# Altium PCB Amplifier.PcbDoc
Units mm, origin at the board's own origin, x right, y up, seen from the top; angles counter-clockwise.
Board outline 40.88 x 23.94 mm, 2 copper layers (Top Layer, Bottom Layer); 18 components, 10 nets, 33 pads, 55 vias.
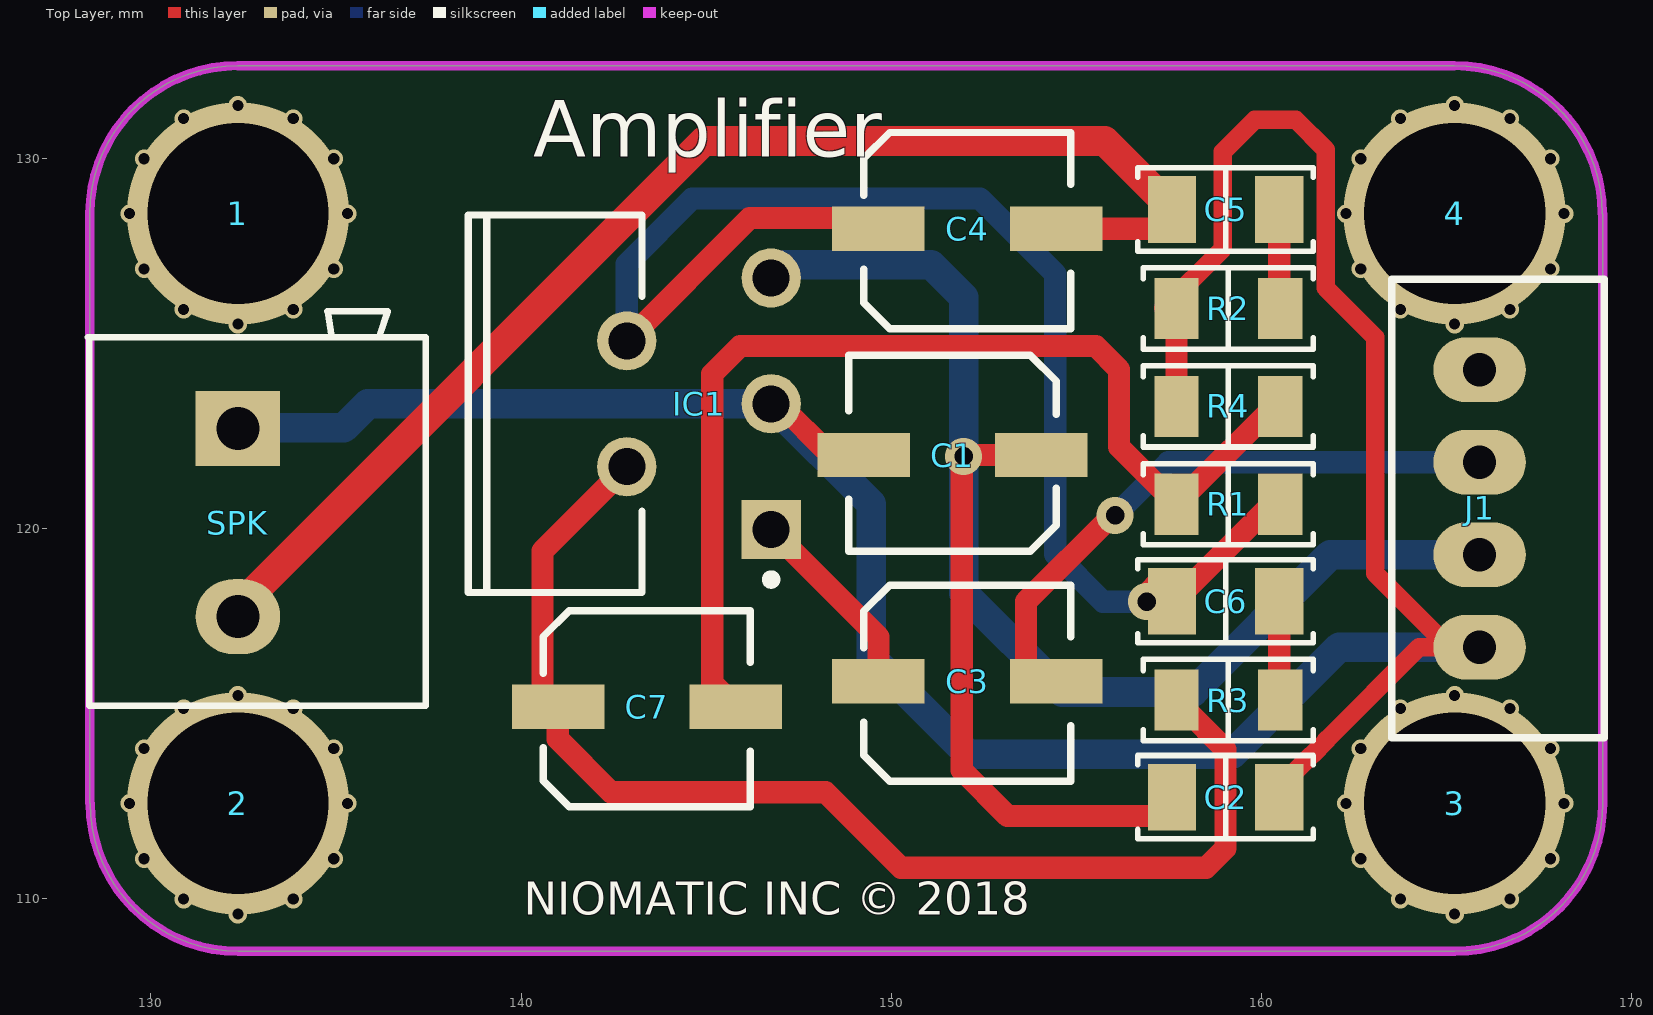
[diagram p0: Top Layer view]
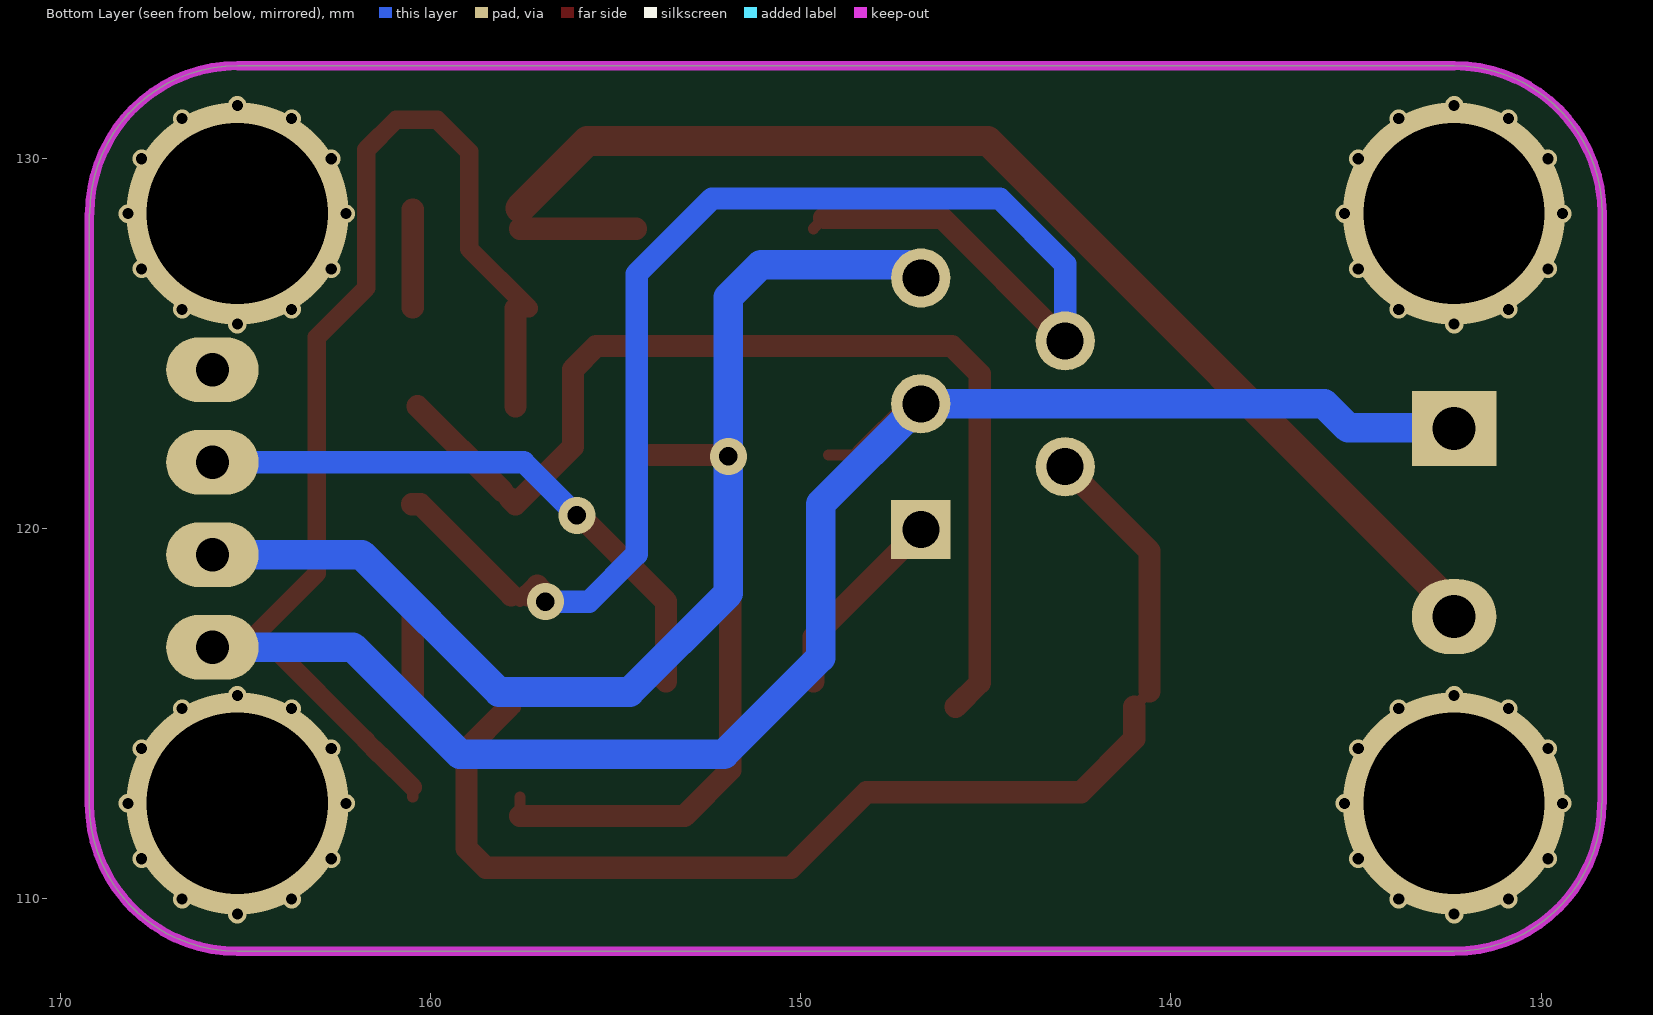
[diagram p1: Bottom Layer view, seen from below]
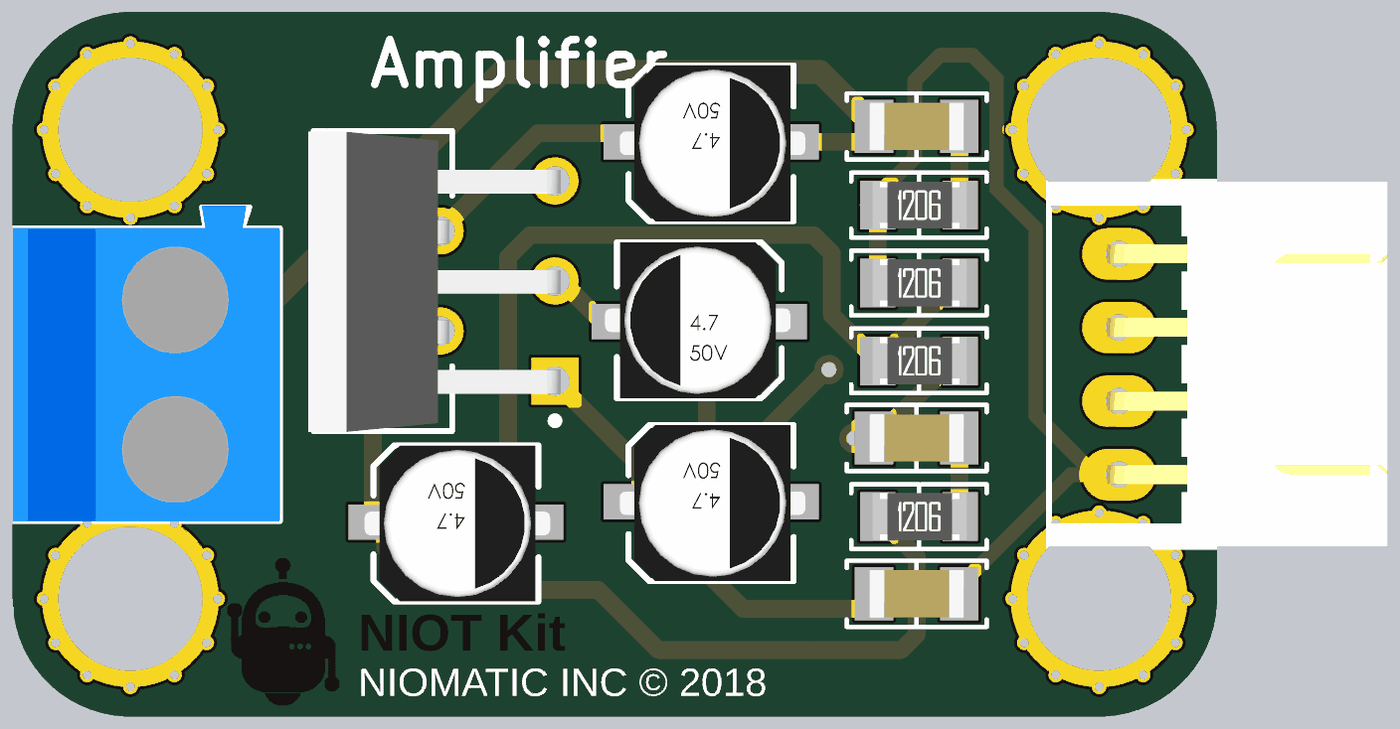
[diagram p2: 3D render of the assembled board from above, using the file's embedded part models]

## Layer stack, top to bottom
Top Solder: solder mask 0.0102, Solder Resist, Dk 3.5
Top Layer: signal copper 0.0356
Dielectric 1: dielectric 0.32, FR-4, Dk 4.8
Bottom Layer: signal copper 0.0356
Bottom Solder: solder mask 0.0102, Solder Resist, Dk 3.5

## Board outline
128.35,112.56 128.35,128.5 cw(c132.35,128.5) 132.35,132.5 165.22,132.5 cw(c165.22,128.5) 169.22,128.5 169.229,128.5 169.229,112.56 cw(c165.229,112.56) 165.229,108.56 132.359,108.56 cw(c132.359,112.56)

## Design rules (kind name [scope] priority, off if disabled: settings)
Clearance [All] p1: gap=0.2 ignorepadtopadclearanceinfootprint=FALSE
PolygonConnect [All] p1: connectstyle=Relief reliefconductorwidth=0.254 reliefentries=4 polygonreliefangle="90 Angle" airgapwidth=0.254
RoomDefinition Amplifier [InComponentClass('Amplifier')] p1: confinementstyle=ConfineIn formatcopy=TRUE lockcomponents=FALSE outline 178.943,26.924 198.247,26.924 198.247,44.577 178.943,44.577
RoutingVias [All] p1: holewidth=0.711 width=1.27 viastyle="Through Hole" minholewidth=0.711 minwidth=1.27 maxholewidth=0.711 maxwidth=1.27
SolderMaskExpansion [All] p1: expansion=0.102
Width [All] p1: maxlimit=0.3 minlimit=0.3 preferedwidth=0.3
30 further rules are at their usual default settings.

## Classes and differential pairs
component class Amplifier: 1 2 3 4 C1 C3 C4 C5 C6 C7 IC1 J1 R1 R2 R3 R4 SPK

## Components (designator, comment, footprint, x,y, rotation, side; value= is the part's Value field where it differs from the comment)
1 "Lego" "Lego Hole" 132.35,128.5 r90 top
2 "Lego" "Lego Hole" 132.35,112.56 r90 top
3 "Lego" "Lego Hole" 165.23,112.56 r90 top
4 "Lego" "Lego Hole" 165.23,128.5 r90 top
C1 "100uF" "CAP ALUM 5MM" 151.86,121.975 r180 top value=10uF
C2 "100nF" "CAP 1206/3216" 159.04,112.73 r180 top value=0.1uF
C3 "1uF" "CAP ALUM 5MM" 151.86,115.86 r0 top value=10uF
C4 "470+uF" "CAP ALUM 5MM" 151.86,128.09 r0 top value=10uF
C5 "100nF" "CAP 1206/3216" 159.04,128.61 r180 top value=0.1uF
C6 "47nF" "CAP 1206/3216" 159.04,118.023 r180 top value=0.1uF
C7 "470uF" "CAP ALUM 5MM" 143.2,115.17 r0 top value=10uF
IC1 "AUDIO AMPLIFIER" TDA2003 144.81,123.36 r180 top
J1 "4 Pin" "JST XH B4B-XH-A - RIGHT" 165.904,120.53 r90 top
R1 "220R" "RES 1206/3216" 159.115,120.645 r0 top value=1K
R2 "1R" "RES 1206/3216" 159.115,125.938 r0 top value=1K
R3 "47R" "RES 1206/3216" 159.115,115.352 r0 top value=1K
R4 "2.2R" "RES 1206/3216" 159.115,123.292 r0 top value=1K
SPK "SPK" Socket_Blue_2 132.35,120.149 r270 top

## Footprints (in the part's own frame and the unit in brackets; to place one, negate y for a bottom-side part, rotate by r counter-clockwise, add the part's x,y. Pads: shape width x height; smd on the part's side, far side on the other; paste and mask are expansions set on the pad)
"CAP 1206/3216" [mm] "Chip Capacitor, 2-Leads, Body 3.25x1.60mm, IPC Medium Density"
  rect 1.3x1.8 smd: 1(-1.45,0) 2(1.45,0)
  silkscreen extent -2.38,-1.12 2.37,1.12, body extent -1.6,-0.81 1.6,0.81, height 1.62
"CAP ALUM 5MM" [mm] "Aluminum Electrolytic Capacitor, Body 6.60x6.60x7.70mm, IPC Low Density"
  rect 2.5x1.2 smd: 1(-2.2,0) 2(2.6,0)
  silkscreen extent -2.6,-2.7 3,2.6, body extent -2.9,-2.7 3.4,2.6, height 5.7
"JST XH B4B-XH-A - RIGHT" [mm]
  oval 1.75x2.5 hole 0.9: 1(-3.75,0) 2(-1.25,0) 3(1.25,0) 4(3.75,0)
  silkscreen extent -6.2,-3.38 6.2,2.38, body extent -6.2,-9.13 6.2,2.37, height 6.1
"Lego Hole" [mm]
"RES 1206/3216" [mm] "Chip Resistor, 2-Leads, Body 3.13x1.55mm, IPC Medium Density"
  rect 1.2x1.65 smd: 1(-1.4,0) 2(1.4,0)
  silkscreen extent -2.3,-1.1 2.3,1.1, body extent -1.57,-0.8 1.62,0.8, height 0.6
Socket_Blue_2 [mil]
  rect 80x90 hole 46: 1(-100,0)
  oval 80x90 hole 46: 2(100,0)
  silkscreen extent -225,-160 195,200, body extent -227,-157 195,200, height 493
TDA2003 [mm] "FM, 5-Leads, Body 10.2x4.7mm, Pitch 1.7mm"
  rect 1.6x1.6 hole 1: 1(-1.95,3.4)
  round 1.6 hole 1: 2(1.95,1.7) 3(-1.95,0) 4(1.95,-1.7) 5(-1.95,-3.4)
  silkscreen extent -2.07,-5.1 6.24,5.1, body extent -2.13,-5.07 6.43,5.13, height 22

## Part data
C1 C3 C4 C7: library part "Polarised Capacitor", "SMT Polarised Capacitor"
C2 C5 C6: library part Capacitor, "SMT Capacitor"
IC1: library part TDA2003V, Package=CB360, Availability=Unavailable, DeviceName=V, DeviceSetName=TDA2003, GateName_1=A, LibraryName=TDA2003, MF="Vishay Semiconductor", MP=TDA2003, Price=None, SymbolName_1=OPAMP+GN
R1 R2 R3 R4: library part Resistor, "SMT Resistor"
SPK: library part "2 Pin"

## Via types
v1: diameter 0.5, hole 0.3, Top Layer to Bottom Layer, 48 vias
v2: diameter 6, hole 4.9, Top Layer to Bottom Layer, 4 vias
v3: diameter 1, hole 0.5, Top Layer to Bottom Layer, tented both sides, 3 vias

## Nets (pads, with @x,y where several pads share a name; then routed paths per layer and width w, separated by ;. In a path a pad name is that pad's centre, name@x,y a point inside that pad or via, vN(x,y) a via of type N, cw(c..) or ccw(c..) an arc to the next point about the centre after c; other vN are vias at no path point)
AUDIO: C3.2 J1.3 | length 16.8
  Top Layer w0.3: C3.2@153.65,115.86 C3.2 ; v3@155.981,120.345 v3(156.058,120.345)
  Top Layer w0.6: C3.2@153.65,115.86 153.65,118.014 v3@155.981,120.345
  Bottom Layer w0.6: v3(156.058,120.345) 157.492,121.78 J1.3
C1: C7.2 R1.1 R4.2 | length 28.8
  Top Layer w0.3: C7.2 C7.2@145.821,115.17 ; R4.2@160.362,123.292 R4.2
  Top Layer w0.6: C7.2@145.821,115.17 145.17,115.821 145.17,124.164 145.926,124.92 155.53,124.92 156.16,124.29 156.16,122.2 R1.1 R1.1@157.88,120.81 ; R1.1@158.07,121 R4.2@160.362,123.292
GND: C1.2 C2.1 IC1.3 J1.1 R2.1 R4.1 SPK.1 | length 77.2
  Top Layer w0.3: IC1.3 IC1.3@146.98,123.36 ; C1.2@148.365,121.975 C1.2 ; R2.1@157.358,125.938 R2.1 ; C2.1 C2.1@160.49,113
  Top Layer w0.5: R2.1@157.358,125.938 158.97,127.55 158.97,130.17 159.83,131.03 160.94,131.03 161.747,130.223 161.747,126.49 163.08,125.157 163.08,118.78 165.08,116.78 164.27,116.78 161.765,114.275 161.765,114.257 161.384,113.877 161.367,113.877 C2.1@160.49,113
  Top Layer w0.6: IC1.3@146.98,123.36 C1.2@148.365,121.975 ; R4.1 R2.1
  Bottom Layer w0.6: SPK.1@132.35,122.94 SPK.1@132.58,122.71
  Bottom Layer w0.8: SPK.1@132.58,122.71 135.21,122.71 135.86,123.36 IC1.3 149.47,120.65 149.47,116.5 152.08,113.89 159.22,113.89 162.11,116.78 J1.1
NetC3_1: C3.1 IC1.1 | length 5.3
  Top Layer w0.6: IC1.1 149.66,117.06 C3.1
NetC4_1: C4.1 C6.2 IC1.4 R1.2 | length 39.3
  Top Layer w0.3: C4.1@149.37,128.38 C4.1 ; C6.2@157.384,118.186 C6.2@157.59,118.186 ; C6.2 C6.2@157.59,118.186 ; C6.2@157.826,118.186 C6.2@157.59,118.186
  Top Layer w0.6: IC1.4 146.18,128.38 C4.1@149.37,128.38 ; v3(156.91,118.01) 156.91,118.226 157.127,118.443 C6.2@157.384,118.186 ; C6.2@157.826,118.186 160.285,120.645 R1.2
  Bottom Layer w0.6: IC1.4 142.86,127.137 144.628,128.905 152.4,128.905 154.44,126.865 154.44,119.296 155.726,118.01 v3(156.91,118.01)
NetC4_2: C4.2 C5.2 SPK.2 | length 34.9
  Top Layer w0.3: C5.2@157.59,128.09 C5.2 C5.2@157.59,128.644
  Top Layer w0.6: C4.2 C5.2@157.59,128.09
  Top Layer w0.8: SPK.2@132.35,117.86 144.95,130.46 155.774,130.46 C5.2@157.59,128.644
NetC5_1: C5.1 R2.2 | length 2.7
  Top Layer w0.3: R2.2@160.49,125.963 R2.2
  Top Layer w0.6: R2.2@160.49,125.963 C5.1
NetC6_1: C6.1 R3.2 | length 2.7
  Top Layer w0.6: C6.1 160.49,115.377 R3.2
NetC7_1: C7.1 IC1.2 R3.1 | length 32.9
  Top Layer w0.3: C7.1@140.58,115.59 C7.1 C7.1@140.995,115.17 ; R3.1 157.715,115.138 R3.1@157.922,115.138
  Top Layer w0.6: C7.1@140.58,115.59 140.58,119.38 IC1.2 ; C7.1@140.995,115.17 140.995,114.3 142.435,112.86 148.23,112.86 150.27,110.82 158.51,110.82 159.04,111.35 159.04,114.02 R3.1@157.922,115.138
VCC: C1.1 C2.2 IC1.5 J1.2 | length 47.6
  Top Layer w0.3: C2.2@157.59,112.22 C2.2
  Top Layer w0.6: C1.1 151.995,121.975 v3(151.96,121.94) 151.91,121.89 151.91,113.46 153.15,112.22 C2.2@157.59,112.22
  Bottom Layer w0.6: IC1.5 IC1.5@147.12,127.12
  Bottom Layer w0.8: IC1.5@147.12,127.12 151.08,127.12 151.96,126.24 v3(151.96,121.94) 151.96,118.24 154.63,115.57 158.16,115.57 161.87,119.28 J1.2
pads on no net: J1.4
copper on no net:
  other v1: 132.35,109.571 165.23,109.571 130.884,109.971 133.844,109.971 163.764,109.971 166.724,109.971 129.812,111.066 134.939,111.066 162.692,111.066 167.819,111.066 129.42,112.56 135.31,112.56 162.3,112.56 168.19,112.56 129.812,114.041 134.939,114.041 162.692,114.041 167.819,114.041 130.884,115.124 133.844,115.124 163.764,115.124 166.724,115.124 132.35,115.481 165.23,115.481 132.35,125.511 165.23,125.511 130.884,125.911 133.845,125.911 163.764,125.911 166.725,125.911 129.812,127.005 134.939,127.005 162.692,127.006 167.819,127.006 129.42,128.5 135.31,128.5 162.3,128.5 168.19,128.5 129.812,129.981 134.939,129.981 162.692,129.981 167.819,129.981 130.884,131.064 133.845,131.064 163.764,131.064 166.725,131.064 132.35,131.421 165.23,131.421
  other v2: 132.35,112.56 165.23,112.56 132.35,128.5 165.23,128.5

## Keep-outs
Keep-Out Layer:
  lines w0.254: 128.35,112.56 128.35,128.5 cw(c132.35,128.5) 132.35,132.5 165.22,132.5 ; 128.359,112.56 ccw(c132.359,112.56) 132.359,108.56 165.229,108.56 ccw(c165.229,112.56) 169.229,112.56 169.229,128.5 ; 165.22,132.5 cw(c165.22,128.5) 169.22,128.5

## Silkscreen, mask and mechanical layers (free items; w line width, h text height)
Top Overlay:
  text "Amplifier" at 140.334,130.03 h1.52
  text "NIOMATIC INC © 2018" at 140.08,109.26 h1.52
Top Solder:
  drawing of 381 lines, arcs and shapes, not listed
  text "NIOT Kit" at 140.08,110.8 h2